# EAGLE board eib-64-nanoz-adapter-long (EAGLE 9.5.2)
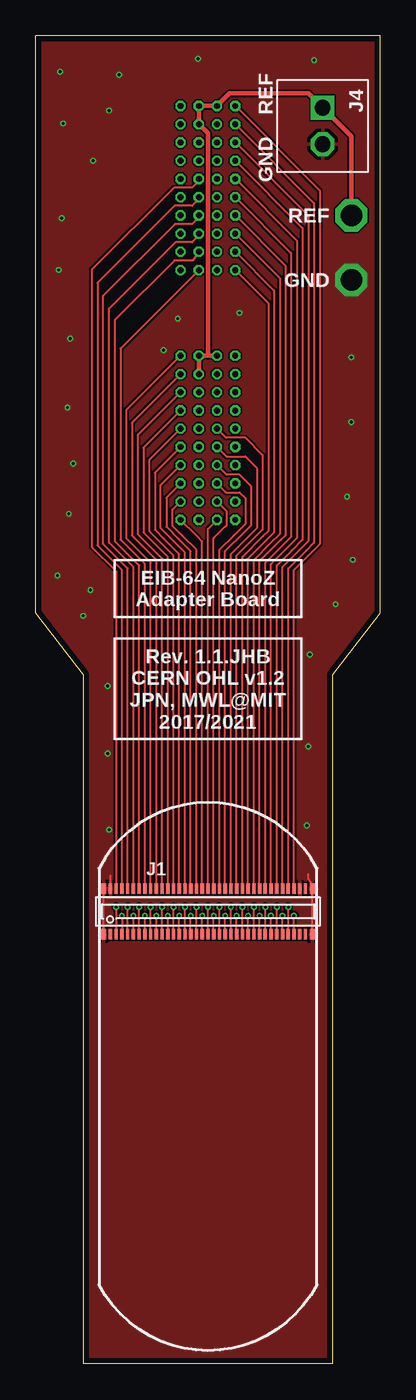
[diagram p0: board, top side]
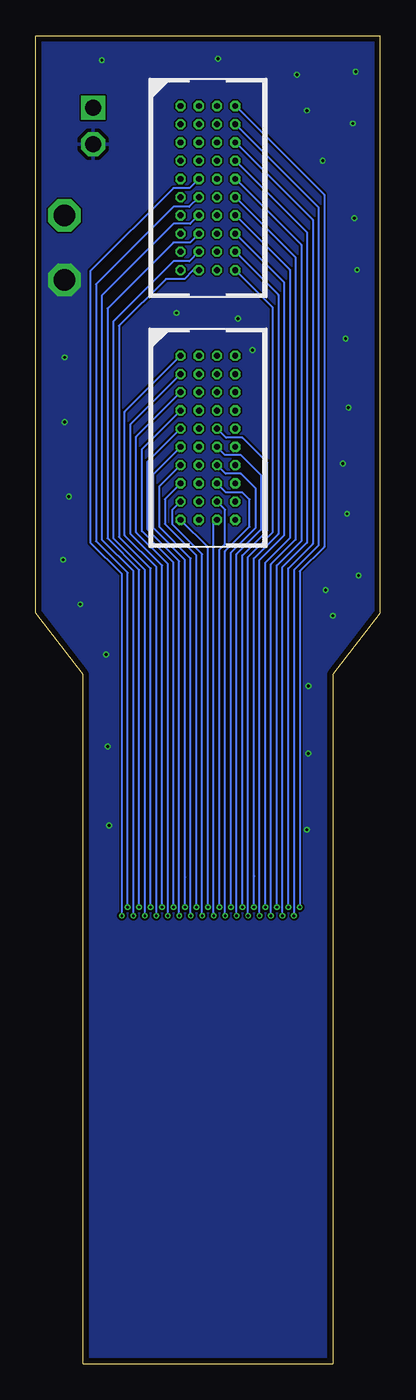
[diagram p1: board, bottom side, seen from below]

Size 24 x 92.5 mm. Coordinates in mm from the lower left corner, seen from the top.
Outline: 20.7,0 20.7,48 24,52.3 24,92.5 0,92.5 0,52.3 3.3,48 3.3,0 20.7,0
Copper layers (1*2*15*16): Top 0.035mm / dielectric 0.2mm / Route2 0.0175mm / dielectric 0.3mm / Route15 0.0175mm / dielectric 0.2mm / Bottom 0.035mm
Design rules "seeed-studio-4-layer *": minimum track width 5mil, minimum drill 0.2mm, track to track 5mil, track to pad 5mil, pad to pad 5mil, via to via 5mil, smd to smd 0mil, copper to edge 0.4mm, drill to drill 10mil, minimum pad ring 6mil, minimum via ring 4mil, stop-mask expansion 4mil, vias tented up to drill 100mil, thermal gap 10mil
Net classes: 1 thick: width 0.102 mm

## Footprints (pad centres in the part's own frame; a part is rotated, then mirrored left to right if it is on the bottom)
DF40-70HEAD = smd 0.23 x 0.75: 1 -6.8,-1.585; 2 -6.4,-1.585; 3 -6,-1.585; 4 -5.6,-1.585; 5 -5.2,-1.585; 6 -4.8,-1.585; 7 -4.4,-1.585; 8 -4,-1.585; 9 -3.6,-1.585; 10 -3.2,-1.585; 11 -2.8,-1.585; 12 -2.4,-1.585; 13 -2,-1.585; 14 -1.6,-1.585; 15 -1.2,-1.585; 16 -0.8,-1.585; 17 -0.4,-1.585; 18 0,-1.585; 19 0.4,-1.585; 20 0.8,-1.585; 21 1.2,-1.585; 22 1.6,-1.585; 23 2,-1.585; 24 2.4,-1.585; 25 2.8,-1.585; 26 3.2,-1.585; 27 3.6,-1.585; 28 4,-1.585; 29 4.4,-1.585; 30 4.8,-1.585; 31 5.2,-1.585; 32 5.6,-1.585; 33 6,-1.585; 34 6.4,-1.585; 35 6.8,-1.585; 36 6.8,1.585; 37 6.4,1.585; 38 6,1.585; 39 5.6,1.585; 40 5.2,1.585; 41 4.8,1.585; 42 4.4,1.585; 43 4,1.585; 44 3.6,1.585; 45 3.2,1.585; 46 2.8,1.585; 47 2.4,1.585; 48 2,1.585; 49 1.6,1.585; 50 1.2,1.585; 51 0.8,1.585; 52 0.4,1.585; 53 0,1.585; 54 -0.4,1.585; 55 -0.8,1.585; 56 -1.2,1.585; 57 -1.6,1.585; 58 -2,1.585; 59 -2.4,1.585; 60 -2.8,1.585; 61 -3.2,1.585; 62 -3.6,1.585; 63 -4,1.585; 64 -4.4,1.585; 65 -4.8,1.585; 66 -5.2,1.585; 67 -5.6,1.585; 68 -6,1.585; 69 -6.4,1.585; 70 -6.8,1.585 | smd 0.35 x 0.75: M1 -7.275,-1.585; M2 7.275,-1.585; M3 7.275,1.585; M4 -7.275,1.585
MOLC-110-11-S-Q = drill 0.406 octagon: A1 -1.905,5.715; A2 -1.905,4.445; A3 -1.905,3.175; A4 -1.905,1.905; A5 -1.905,0.635; A6 -1.905,-0.635; A7 -1.905,-1.905; A8 -1.905,-3.175; A9 -1.905,-4.445; A10 -1.905,-5.715; B1 -0.635,5.715; B2 -0.635,4.445; B3 -0.635,3.175; B4 -0.635,1.905; B5 -0.635,0.635; B6 -0.635,-0.635; B7 -0.635,-1.905; B8 -0.635,-3.175; B9 -0.635,-4.445; B10 -0.635,-5.715; C1 0.635,5.715; C2 0.635,4.445; C3 0.635,3.175; C4 0.635,1.905; C5 0.635,0.635; C6 0.635,-0.635; C7 0.635,-1.905; C8 0.635,-3.175; C9 0.635,-4.445; C10 0.635,-5.715; D1 1.905,5.715; D2 1.905,4.445; D3 1.905,3.175; D4 1.905,1.905; D5 1.905,0.635; D6 1.905,-0.635; D7 1.905,-1.905; D8 1.905,-3.175; D9 1.905,-4.445; D10 1.905,-5.715
SCREW2 = drill 1.1 square: P$1 0,0 | drill 1.1 octagon: P$2 2.54,0

## Placement (x,y rotation side)
J1  DF40-REC  [DF40-70HEAD]  12,31.5 0 top
J2  [MOLC-110-11-S-Q]  12,81.9 0 bottom
J3  [MOLC-110-11-S-Q]  12,64.5 0 bottom
J4  SCREW2  [SCREW2]  20,87.5 270 top

## Library data of the parts
J1-J4 = jonnew

## Nets
E0: J1.2 J2.D1
E1: J1.69 J2.C5
E2: J1.3 J2.D2
E3: J1.68 J2.C6
E4: J1.4 J2.D3
E5: J1.67 J2.C7
E6: J1.5 J2.D4
E7: J1.66 J2.C8
E8: J1.6 J2.D5
E9: J1.65 J2.C9
E10: J1.7 J2.D6
E11: J1.64 J2.C10
E12: J1.8 J2.D7
E13: J1.63 J3.D1
E14: J1.9 J2.D8
E15: J1.62 J3.D2
E16: J1.10 J2.D9
E17: J1.61 J3.D3
E18: J1.11 J2.D10
E19: J1.60 J3.D4
E20: J1.12 J3.C5
E21: J1.59 J3.D5
E22: J1.13 J3.C6
E23: J1.58 J3.D6
E24: J1.14 J3.C7
E25: J1.57 J3.D7
E26: J1.15 J3.C8
E27: J1.56 J3.D8
E28: J1.16 J3.C9
E29: J1.55 J3.D9
E30: J1.17 J3.C10
E31: J1.54 J3.D10
E32: J1.18 J3.A10
E33: J1.53 J3.B10
E34: J1.19 J3.A9
E35: J1.52 J3.B9
E36: J1.20 J3.A8
E37: J1.51 J3.B8
E38: J1.21 J3.A7
E39: J1.50 J3.B7
E40: J1.22 J3.A6
E41: J1.49 J3.B6
E42: J1.23 J3.A5
E43: J1.48 J3.B5
E44: J1.24 J3.A4
E45: J1.47 J2.A10
E46: J1.25 J3.A3
E47: J1.46 J2.A9
E48: J1.26 J3.A2
E49: J1.45 J2.A8
E50: J1.27 J3.A1
E51: J1.44 J2.A7
E52: J1.28 J2.B10
E53: J1.43 J2.A6
E54: J1.29 J2.B9
E55: J1.42 J2.A5
E56: J1.30 J2.B8
E57: J1.41 J2.A4
E58: J1.31 J2.B7
E59: J1.40 J2.A3
E60: J1.32 J2.B6
E61: J1.39 J2.A2
E62: J1.33 J2.B5
E63: J1.38 J2.A1
GND: J1.37 J1.70 J1.M1 J1.M2 J1.M3 J1.M4 J4.P$2
REF: J2.B1 J2.C1 J2.C2 J3.B1 J3.C1 J3.C2 J4.P$1

## Tracks (layer width: path | path; a pad name or v marks a point on that pad's centre or on a via)
E0  (via drill 0.2)
  Top 0.127: v5.6,31.8 J1.2
  Bottom 0.127: J2.D1 3.9,81.42 3.9,56.9 5.6,55.2 v5.6,31.8
E1
  Top 0.127: J2.C5 11.49,82.54 10.89,81.94 9.64,81.94 3.9,76.2 3.9,56.9 5.6,55.2 J1.69
E2  (via drill 0.2)
  Top 0.127: v6,31.2 J1.3
  Bottom 0.127: J2.D2 4.3,80.55 4.3,57 6,55.3 v6,31.2
E3
  Top 0.127: J2.C6 11.49,81.27 10.89,80.67 9.67,80.67 4.3,75.3 4.3,57 6,55.3 J1.68
E4  (via drill 0.2)
  Top 0.127: J1.4 v6.4,31.8
  Bottom 0.127: J2.D3 4.7,79.68 4.7,57.1 6.4,55.4 v6.4,31.8
E5
  Top 0.127: J2.C7 11.49,80 10.89,79.4 9.7,79.4 4.7,74.4 4.7,57.1 | 4.7,57.1 6.4,55.4 | J1.67 6.4,55.4 | 6.4,55.4 4.7,57.1
E6  (via drill 0.2)
  Top 0.127: J1.5 v6.8,31.2
  Bottom 0.127: J2.D4 5.1,78.81 5.1,57.2 6.8,55.5 v6.8,31.2
E7
  Top 0.127: J2.C8 11.49,78.73 10.89,78.13 9.73,78.13 5.1,73.5 5.1,57.2 | 5.1,57.2 6.8,55.5 | J1.66 6.8,55.5 | 6.8,55.5 5.1,57.2
E8  (via drill 0.2)
  Top 0.127: J1.6 v7.2,31.8
  Bottom 0.127: J2.D5 5.5,77.94 5.5,57.3 7.2,55.6 v7.2,31.8
E9
  Top 0.127: J2.C9 10.93,76.86 9.66,76.86 5.5,72.7 5.5,57.3 7.2,55.6 J1.65
E10  (via drill 0.2)
  Top 0.127: J1.7 v7.6,31.2
  Bottom 0.127: J2.D6 5.9,77.07 5.9,57.4 7.6,55.7 v7.6,31.2
E11
  Top 0.127: J2.C10 5.9,70.72 5.9,57.4 7.6,55.7 J1.64
E12  (via drill 0.2)
  Top 0.127: J1.8 v8,31.8
  Bottom 0.127: J2.D7 6.3,76.2 6.3,57.5 8,55.8 v8,31.8
E13
  Top 0.127: J3.D1 6.3,66.42 6.3,57.5 8,55.8 J1.63
E14  (via drill 0.2)
  Top 0.127: J1.9 v8.4,31.2
  Bottom 0.127: J2.D8 6.7,75.33 6.7,57.7 8.4,56 v8.4,31.2
E15
  Top 0.127: J3.D2 6.7,65.55 6.7,57.7 8.4,56 J1.62
E16  (via drill 0.2)
  Top 0.127: J1.10 v8.8,31.8
  Bottom 0.127: 8.8,34 8.8,56.1 7.1,57.8 7.1,74.46 J2.D9 | 8.8,34 8.8,33.9 | v8.8,31.8 8.8,34
E17
  Top 0.127: J3.D3 7.1,64.68 7.1,57.8 7.7,57.2 | 7.7,57.2 8.8,56.1 | J1.61 8.8,56.1 | 8.8,56.1 7.7,57.2
E18  (via drill 0.2)
  Top 0.127: J1.11 v9.2,31.2
  Bottom 0.127: J2.D10 7.5,73.59 7.5,57.9 9.2,56.2 v9.2,31.2
E19
  Top 0.127: J3.D4 7.5,63.81 7.5,57.9 7.95,57.45 | 7.95,57.45 9.2,56.2 | J1.60 9.2,56.2 | 9.2,56.2 7.95,57.45
E20  (via drill 0.2)
  Top 0.127: J1.12 v9.6,31.8
  Bottom 0.127: J3.C5 10.73,64.5 9.6,64.5 7.9,62.8 7.9,58 9.6,56.3 v9.6,31.8
E21
  Top 0.127: J3.D5 7.9,62.94 7.9,58 8.2,57.7 | 8.2,57.7 9.6,56.3 | J1.59 9.6,56.3 | 9.6,56.3 8.2,57.7
E22  (via drill 0.2)
  Top 0.127: J1.13 v10,31.2
  Bottom 0.127: J3.C6 10.8,63.3 9.7,63.3 8.3,61.9 8.3,58.1 10,56.4 v10,31.2
E23
  Top 0.127: J3.D6 8.3,62.07 8.3,58.1 8.95,57.45 | 8.95,57.45 10,56.4 | J1.58 10,56.4 | 10,56.4 8.95,57.45
E24  (via drill 0.2)
  Top 0.127: J1.14 v10.4,31.8
  Bottom 0.127: J3.C7 10.77,62 9.7,62 8.7,61 8.7,58.2 10.4,56.5 v10.4,31.8
E25
  Top 0.127: J3.D7 8.7,61.2 8.7,58.2 | 8.7,58.2 10.4,56.5 | J1.57 10.4,56.5 | 10.4,56.5 8.7,58.2
E26  (via drill 0.2)
  Top 0.127: J1.15 v10.8,31.2
  Bottom 0.127: J3.C8 10.74,60.7 9.6,60.7 9.1,60.2 9.1,58.3 10.8,56.6 v10.8,31.2
E27
  Top 0.127: J3.D8 9.1,60.33 9.1,58.3 9.95,57.45 | 9.95,57.45 10.8,56.6 | J1.56 10.8,56.6 | 10.8,56.6 9.95,57.45
E28  (via drill 0.2)
  Top 0.127: J1.16 v11.2,31.8
  Bottom 0.127: J3.C9 10.8,59.49 10.8,57.1 11.2,56.7 v11.2,31.8
E29
  Top 0.127: J3.D9 9.5,59.46 9.5,58.4 10.2,57.7 | 10.2,57.7 11.2,56.7 | J1.55 11.2,56.7 | 11.2,56.7 10.2,57.7
E30  (via drill 0.2)
  Top 0.127: J1.17 v11.6,31.2
  Bottom 0.127: J3.C10 11.6,58.55 v11.6,31.2
E31
  Top 0.127: 11.19,57.69 J3.D10 | 11.19,57.69 11.6,57.28 | J1.54 11.6,57.28 | 11.6,57.28 11.19,57.69
E32  (via drill 0.2)
  Top 0.127: J1.18 v12,31.8
  Bottom 0.127: J3.A10 12,56.88 v12,31.8
E33
  Top 0.127: 12,58.15 J3.B10 12,58.15 | J1.53 12,58.15
E34  (via drill 0.2)
  Top 0.127: J1.19 v12.4,31.2
  Bottom 0.127: J3.A9 14.5,59.46 14.5,58.5 12.4,56.4 v12.4,31.2
E35
  Top 0.127: J3.B9 13.3,59.39 13.3,58.4 13.2,58.3 | 13.2,58.3 12.4,57.5 | J1.52 12.4,57.5 | 12.4,57.5 13.2,58.3
E36  (via drill 0.2)
  Top 0.127: J1.20 v12.8,31.8
  Bottom 0.127: J3.A8 15,60.23 15,58.5 12.8,56.3 v12.8,31.8
E37
  Top 0.127: J3.B8 13.26,60.7 14.2,60.7 14.6,60.3 14.6,58.5 13.8,57.7 | 13.8,57.7 12.8,56.7 | J1.51 12.8,56.7 | 12.8,56.7 13.8,57.7
E38  (via drill 0.2)
  Top 0.127: J1.21 v13.2,31.2
  Bottom 0.127: J3.A7 15.4,61.1 15.4,58.3 13.2,56.1 v13.2,31.2
E39
  Top 0.127: J3.B7 13.29,61.94 14.2,61.94 15,61.13 15,58.4 14.55,57.95 | 14.55,57.95 13.2,56.6 | J1.50 13.2,56.6 | 13.2,56.6 14.55,57.95
E40  (via drill 0.2)
  Top 0.127: J1.22 v13.6,31.79 v13.59,31.8
  Bottom 0.127: J3.A6 15.8,61.97 15.8,58.2 13.6,56 13.6,33.9 13.59,33.89 v13.59,31.8
E41
  Top 0.127: J3.B6 13.29,63.2 13.3,63.2 14.6,63.2 15.4,62.4 15.4,58.2 14.85,57.65 | 14.85,57.65 13.6,56.4 | J1.49 13.6,56.4 | 13.6,56.4 14.85,57.65
E42  (via drill 0.2)
  Top 0.127: J1.23 v14,31.2
  Bottom 0.127: J3.A5 16.2,62.84 16.2,58.1 14,55.9 v14,31.2
E43
  Top 0.127: J3.B5 | J3.B5 13.27,64.5 14.6,64.5 15.8,63.3 15.8,58.1 15.6,57.9 | 15.6,57.9 14,56.3 | J1.48 14,56.3 | 14,56.3 15.6,57.9
E44  (via drill 0.2)
  Top 0.127: J1.24 v14.4,31.8
  Bottom 0.127: J3.A4 16.6,63.71 16.6,58 14.4,55.8 v14.4,31.8
E45
  Top 0.127: J2.A10 16.2,73.89 16.2,58 15.85,57.65 | 15.85,57.65 14.4,56.2 | J1.47 14.4,56.2 | 14.4,56.2 15.85,57.65
E46  (via drill 0.2)
  Top 0.127: J1.25 v14.8,31.2
  Bottom 0.127: J3.A3 17,64.58 17,57.9 14.8,55.7 v14.8,31.2
E47
  Top 0.127: J2.A9 16.6,74.76 16.6,57.9 16.1,57.4 | 16.1,57.4 14.8,56.1 | J1.46 14.8,56.1 | 14.8,56.1 16.1,57.4
E48  (via drill 0.2)
  Top 0.127: J1.26 v15.2,31.8
  Bottom 0.127: J3.A2 17.4,65.45 17.4,57.8 15.2,55.6 v15.2,31.8
E49
  Top 0.127: J2.A8 17,75.63 17,57.8 16.35,57.15 | 16.35,57.15 15.2,56 | J1.45 15.2,56 | 15.2,56 16.35,57.15
E50  (via drill 0.2)
  Top 0.127: J1.27 v15.6,31.2
  Bottom 0.127: J3.A1 17.8,66.32 17.8,57.7 15.6,55.5 v15.6,31.2
E51
  Top 0.127: J2.A7 17.4,76.5 17.4,57.7 17.1,57.4 | 17.1,57.4 15.6,55.9 | J1.44 15.6,55.9 | 15.6,55.9 17.1,57.4
E52  (via drill 0.2)
  Top 0.127: J1.28 v16,31.8
  Bottom 0.127: J2.B10 13.03,76.19 13.65,75.57 14.93,75.57 18.2,72.3 18.2,57.6 16,55.4 v16,31.8
E53
  Top 0.127: J2.A6 17.8,77.37 17.8,57.6 17.35,57.15 | 17.35,57.15 16,55.8 | J1.43 16,55.8 | 16,55.8 17.35,57.15
E54  (via drill 0.2)
  Top 0.127: J1.29 v16.4,31.2
  Bottom 0.127: J2.B9 13.3,76.8 14.4,76.8 18.6,72.6 18.6,57.5 16.4,55.3 v16.4,31.2
E55
  Top 0.127: J2.A5 18.2,78.24 18.2,57.5 17.1,56.4 | 17.1,56.4 16.4,55.7 | J1.42 16.4,55.7 | 16.4,55.7 17.1,56.4
E56  (via drill 0.2)
  Top 0.127: J1.30 v16.8,31.8
  Bottom 0.127: J2.B8 13.26,78.1 14.4,78.1 19,73.5 19,57.5 16.8,55.3 v16.8,31.8
E57
  Top 0.127: J2.A4 18.6,79.11 18.6,57.4 17.85,56.65 | 17.85,56.65 16.8,55.6 | J1.41 16.8,55.6 | 16.8,55.6 17.85,56.65
E58  (via drill 0.2)
  Top 0.127: J1.31 v17.2,31.2
  Bottom 0.127: J2.B7 13.23,79.4 14.4,79.4 19.4,74.4 19.4,57.4 17.2,55.2 v17.2,31.2
E59
  Top 0.127: J2.A3 19,79.98 19,57.3 18.6,56.9 | 18.6,56.9 17.2,55.5 | J1.40 17.2,55.5 | 17.2,55.5 18.6,56.9
E60  (via drill 0.2)
  Top 0.127: J1.32 v17.6,31.8
  Bottom 0.127: J2.B6 13.3,80.6 14.4,80.6 19.8,75.2 19.8,57.3 17.6,55.1 v17.6,31.8
E61
  Top 0.127: J2.A2 19.4,80.85 19.4,57.2 18.85,56.65 | 18.85,56.65 17.6,55.4 | J1.39 17.6,55.4 | 17.6,55.4 18.85,56.65
E62  (via drill 0.2)
  Top 0.127: J1.33 v18,31.2
  Bottom 0.127: J2.B5 13.27,81.9 14.4,81.9 20.2,76.1 20.2,57.2 18,55 v18,31.2
E63
  Top 0.127: J2.A1 19.8,81.72 19.8,57.1 19.1,56.4 | 19.1,56.4 18,55.3 | J1.38 18,55.3 | 18,55.3 19.1,56.4
GND  (via drill 0.2, 1.5)
  Top 0.127: J1.M1 J1.M4 | J1.M2 J1.M3 19.27,33.33 19,33.8 19,34.1 | J1.70 5.2,34
  other vias: 22,75.5 20.9,52.9 22.1,56 21.7,60.4 22,65.6 22,70.1 2.2,66.6 2.3,59.2 3.3,52.1 3.8,53.9 1.6,76.2 4,83.8 1.7,90 11.3,90.9 5.8,89.8 19.4,90.8 14.2,73.2 9.9,72.8 8.9,70.6 1.5,54.9 2.6,62.7 2.4,71.4 1.8,79.8 1.9,86.4 5.1,87.3 5.1,37.2 18.9,37.5 19,43 19.1,49.4 5,47.2 5,42.5
  pour Top: -2,94.5 25,94.5 25,-0.5 -2,-0.5
  pour Bottom: -1,93.5 26,93.5 26,-1.5 -1,-1.5
REF  (via drill 1.5)
  Top 0.305: 12,70.22 12,85.71 J2.C2 J2.C1 J2.B1 13.52,88.5 19,88.5 J4.P$1 22,85.5 v22,80 | J3.B1 12,70.22 | 12,70.22 J3.C1 J3.C2

## Text on the board
tPlace: REF | GND | REF | GND | EIB-64 NanoZ / Adapter Board | Rev. 1.1.JHB / CERN OHL v1.2 / JPN, MWL@MIT / 2017/2021